# Altium PCB JO.PcbDoc
Units mm, origin at the board's own origin, x right, y up, seen from the top; angles counter-clockwise.
Board outline 80 x 25 mm, 2 copper layers (Top Layer, Bottom Layer), stack 1.57 mm thick; 8 components, 8 nets, 54 pads, 0 vias.
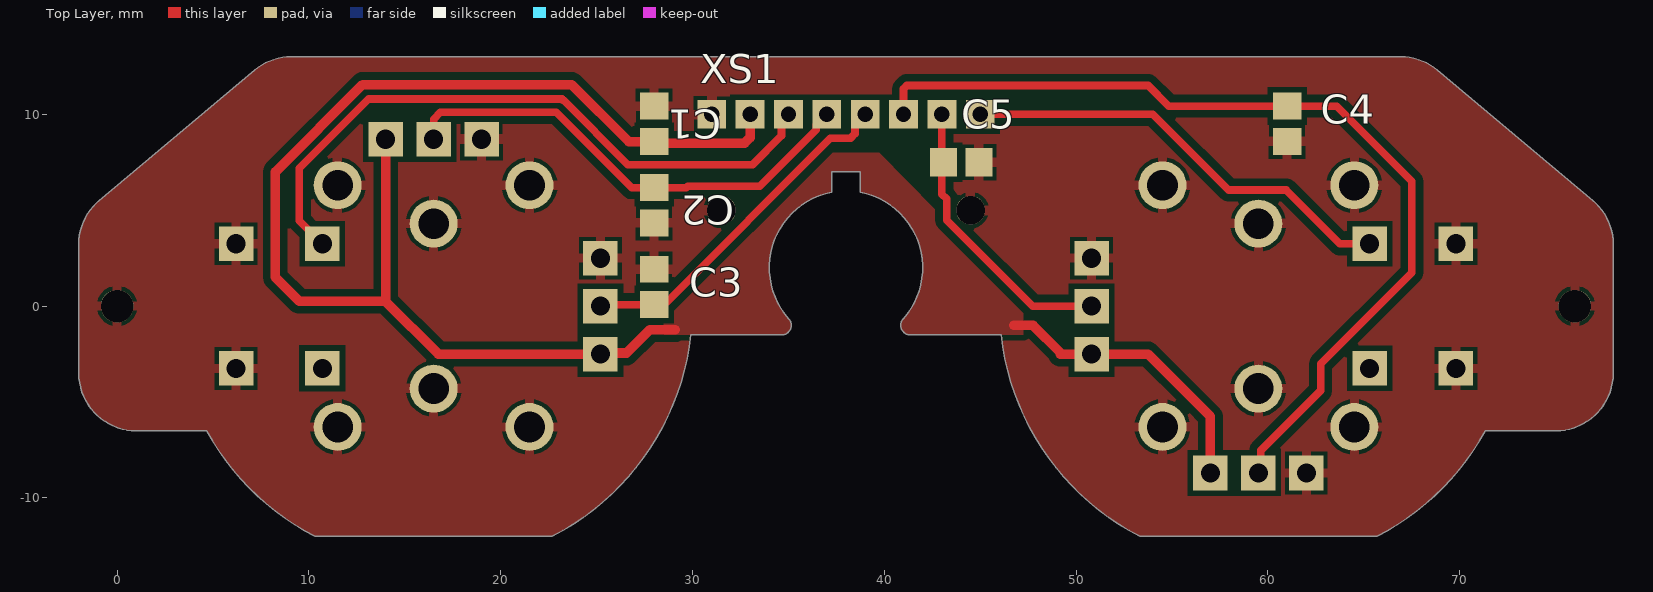
[diagram p0: Top Layer view]
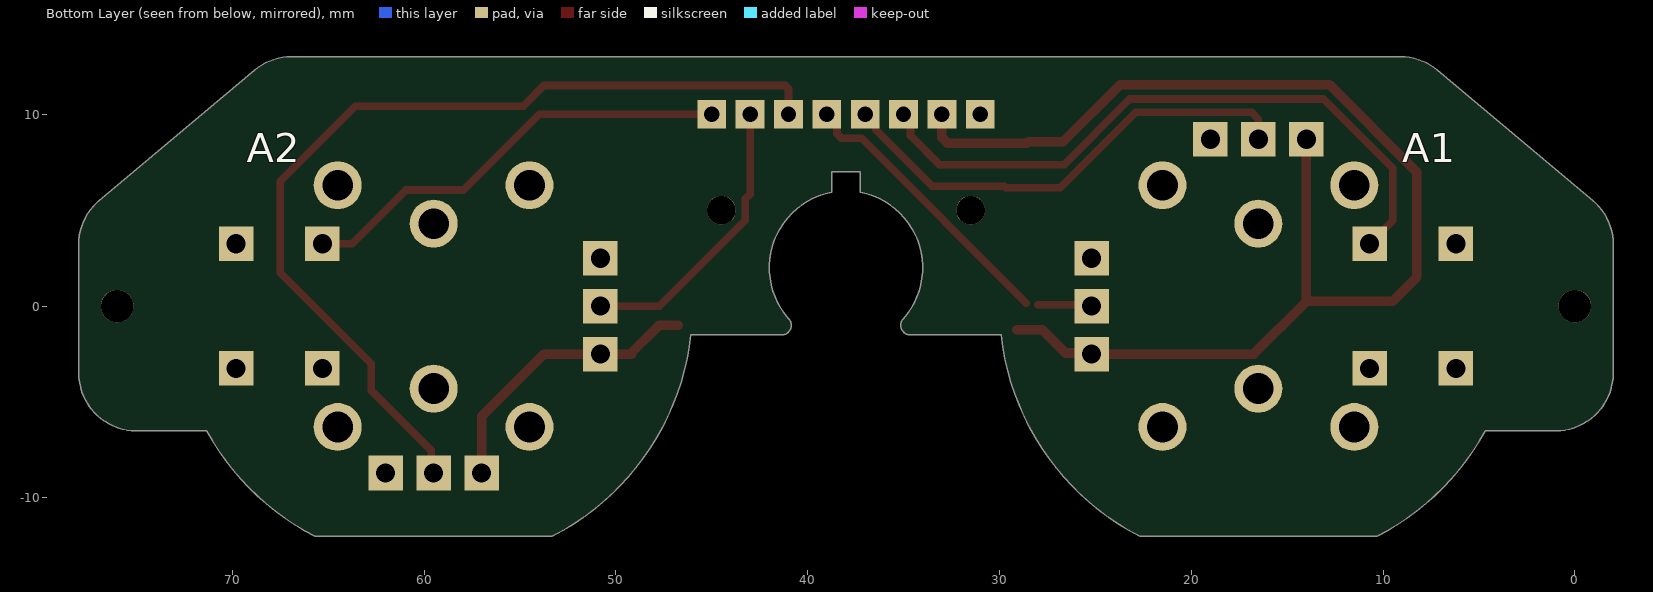
[diagram p1: Bottom Layer view, seen from below]

## Layer stack, top to bottom
Top Solder: solder mask 0.0102, Solder Resist, Dk 3.5
Top Layer: signal copper 0.0356
Dielectric 1: core 1.4986, Core-043, Dk 4.3
Bottom Layer: signal copper 0.0356
Bottom Solder: solder mask 0.0102, Solder Resist, Dk 3.5

## Board outline
1,-6.5 4.668,-6.5 ccw(c16.5,0) 10.315,-12 22.685,-12 ccw(c16.5,0) 29.916,-1.5 34.646,-1.5 ccw(c34.646,-1) 35.019,-0.667 cw(c38,2) 37.25,5.929 37.25,7 38.75,7 38.75,5.929 cw(c38,2) 40.981,-0.667 ccw(c41.354,-1) 41.354,-1.5 46.084,-1.5 ccw(c59.5,0) 53.315,-12 65.685,-12 ccw(c59.5,0) 71.332,-6.5 75,-6.5 ccw(c75,-3.5) 78,-3.5 78,3.21 ccw(c75,3.21) 76.928,5.508 68.836,12.298 ccw(c66.908,10) 66.908,13 9.092,13 ccw(c9.092,10) 7.164,12.298 -0.928,5.508 ccw(c1,3.21) -2,3.21 -2,-3.5 ccw(c1,-3.5)

## Design rules (kind name [scope] priority, off if disabled: settings)
Clearance [All] p1: gap=0.3 ignorepadtopadclearanceinfootprint=FALSE except(0: Arc-Hole Track-Hole SMDPad-Hole THPad-Hole Via-Hole Fill-Hole Poly-Hole Region-Hole Text-Hole; 0.4: Arc-Fill Arc-Poly Arc-Region Track-Fill Track-Poly Track-Region)
FanoutControl Fanout_Default [All] p1: bgadir=Out bgaviamode=Centered fanoutstyle=Auto fanoutdirection=Alternating viagrid=0.025 // Fanout_Default (Default Rule)
FanoutControl Fanout_Small [(CompPinCount < 5)] p2: bgadir=Out bgaviamode=Centered fanoutstyle=Auto fanoutdirection=OutThenIn viagrid=0.025 // Fanout_Small (Default Rule)
FanoutControl Fanout_LCC [IsLCC] p4: bgadir=Out bgaviamode=Centered fanoutstyle=Auto fanoutdirection=Alternating viagrid=0.025 // Fanout_LCC (Default Rule)
FanoutControl Fanout_BGA [IsBGA] p5: bgadir=Out bgaviamode=Centered fanoutstyle=Auto fanoutdirection=Alternating viagrid=0.025 // Fanout_BGA (Default Rule)
PlaneClearance [All] p1: clearance=0.6
PlaneConnect [All] p1: planeconnectstyle=Relief reliefexpansion=0.5 reliefentries=4 reliefconductorwidth=0.3 reliefairgap=0.2
PolygonConnect [All] p1: connectstyle=Relief reliefconductorwidth=0.5 reliefentries=4 polygonreliefangle="90 Angle" airgapwidth=0.2
RoutingCorners [All] p1: cornerstyle=45-Degree minsetback=2.5 maxsetback=2.5
RoutingVias [All] p1: holewidth=0.711 width=1.27 viastyle="Through Hole" minholewidth=0.711 minwidth=1.27 maxholewidth=0.711 maxwidth=1.27
SolderMaskExpansion [All] p1: expansion=0.102 istentingtop=FALSE
Width [All] p1: maxlimit=0.5 minlimit=0.3 preferedwidth=0.3
23 further rules are at their usual default settings.

## Components (designator, comment, footprint, x,y, rotation, side; value= is the part's Value field where it differs from the comment)
A1 "Kalih" Kalih 16.5,0 r0 bottom
A2 "Kalih" Kalih 59.5,0 r180 bottom
C1 "Cap_SMD0805" cap_0805 28,9.5 r270 top
C2 "Cap_SMD0805" cap_0805 28,5.25 r90 top
C3 "Cap_SMD0805" cap_0805 28,1 r270 top
C4 "Cap_SMD0805" cap_0805 61,9.5 r90 top
C5 "Cap_SMD0805" cap_0805 44,7.5 r180 top
XS1 "XS8" 8H_2.5mm 31,10 r0 top

## Footprints (in the part's own frame and the unit in brackets; to place one, negate y for a bottom-side part, rotate by r counter-clockwise, add the part's x,y. Pads: shape width x height; smd on the part's side, far side on the other; paste and mask are expansions set on the pad)
8H_2.5mm [mm]
  rect 1.5x1.5 hole 0.8: 1(0,0) 2(2,0) 3(4,0) 4(6,0) 5(8,0) 6(10,0) 7(12,0) 8(14,0)
cap_0805 [mm]
  rect 1.4x1.5 smd: 1(-0.925,0) 2(0.925,0)
  body extent -1.05,-0.67 1.05,0.67, height 1.35
Kalih [mm]
  rect 1.8x1.8 hole 1 unplated: 1(-2.5,-8.7) 2(0,-8.7) 3(2.5,-8.7) 4(8.7,-2.5) 5(8.7,0) 6(8.7,2.5) 7(-5.8,3.25) 8(-5.8,-3.25) 9(-10.3,3.25) 10(-10.3,-3.25)
  round 2.5 hole 1.6: 11(-5,-6.3) 11(-5,6.3) 11(5,-6.3) 11(5,6.3)
  round 2.5 hole 1.6 unplated: 11(0,-4.3) 11(0,4.3)

## Part data
C1: Ёмкость=0,1
C2 C3 C4 C5: Ёмкость=0.01

## Free pads (board coordinates)
  round 1.7 hole 1.7 unplated: 0(0,0) 0(76,0)
  round 1.5 hole 1.5 unplated: 0(31.5,5) 0(44.5,5)

## Nets (pads, with @x,y where several pads share a name; then routed paths per layer and width w, separated by ;. In a path a pad name is that pad's centre, name@x,y a point inside that pad or via, vN(x,y) a via of type N, cw(c..) or ccw(c..) an arc to the next point about the centre after c; other vN are vias at no path point)
GND: A1.3 A1.4 A1.9 A1.10 A1.11 A2.1 A2.6 A2.9 A2.10 A2.11 C1.1 C2.1 C3.1 C4.1 C5.1 pad.0 XS1.1
NetA1_2: A1.2 C2.2 XS1.4 | length 25.1
  Top Layer w0.4: A1.2 16.5,9.75 16.85,10.1 22.9,10.1 26.825,6.175 C2.2 29.675,6.175 29.75,6.25 33.5,6.25 36.45,9.2 36.45,9.45 XS1.4
NetA1_5: A1.5 C3.2 XS1.5 | length 17.6
  Top Layer w0.4: A1.5 25.275,0.075 C3.2 ; C3.2@28.595,0.155 37.189,8.75 38.233,8.75 38.467,8.984 38.467,9.467 XS1.5
NetA1_8: A1.8 XS1.3 | length 34.4
  Top Layer w0.4: A1.8 9.5,4.45 9.5,7.189 13.111,10.8 23.19,10.8 23.24,10.75 23.25,10.75 26.625,7.375 33.125,7.375 34.634,8.884 34.634,9.634 XS1.3
NetA2_2: A2.2 C4.2 XS1.6 | length 48.5
  Top Layer w0.4: XS1.6 41,11.324 41.176,11.5 53.75,11.5 54.825,10.425 C4.2 63.575,10.425 67.5,6.5 67.5,1.75 62.75,-3 62.75,-4.399 59.623,-7.526 59.623,-8.577 A2.2
NetA2_5: A2.5 C5.2 XS1.7 | length 15
  Top Layer w0.4: XS1.7 43,5.841 43.25,5.591 43.25,4.482 47.732,0 A2.5
NetA2_7: A2.7 XS1.8 | length 23.1
  Top Layer w0.4: XS1.8 54,10 57.95,6.05 60.95,6.05 63.75,3.25 A2.7
VCC: A1.1 A1.6 A2.3 A2.4 C1.2 XS1.2 | length 81.4
  Top Layer w0.5: A1.1 14,0.25 ; 29.106,-1.222 27.778,-1.222 26.557,-2.443 25.257,-2.443 A1.6 16.75,-2.5 14,0.25 ; XS1.2 33,8.793 32.707,8.5 28.575,8.5 28.5,8.575 C1.2 26.675,8.575 23.7,11.55 12.8,11.55 8.25,7 8.25,1.5 9.5,0.25 14,0.25 ; 46.75,-1 47.75,-1 49.172,-2.422 49.172,-2.5 A2.4 53.75,-2.5 57,-5.75 A2.3
pads on no net: A1.7 A2.8

## Polygon pours and split planes (outlines as drawn)
VCC on Top Layer "VCC_L01_P001" (solid, pour order 1): 28.5,0.367 28.5,-1.5 34.646,-1.5 ccw(c34.646,-1) 35.019,-0.667 cw(c38,2) 37.25,5.929 37.25,7 38.75,7 38.75,5.929 cw(c38,2) 40.981,-0.667 ccw(c41.354,-1) 41.354,-1.5 47.25,-1.5 47.25,0.367 39.738,8 36.239,8
GND on Top Layer "GND_L01_P003" (solid, remove dead copper, pour order 3): 1,-6.5 4.668,-6.5 ccw(c16.5,0) 10.315,-12 22.685,-12 ccw(c16.5,0) 29.916,-1.5 26.75,-1.5 37,8.75 39,8.75 49.25,-1.5 46.084,-1.5 ccw(c59.5,0) 53.315,-12 65.685,-12 ccw(c59.5,0) 71.332,-6.5 75,-6.5 ccw(c75,-3.5) 78,-3.5 78,3.21 ccw(c75,3.21) 76.928,5.508 68.836,12.298 ccw(c66.908,10) 66.908,13 9.092,13 ccw(c9.092,10) 7.164,12.298 -0.928,5.508 ccw(c1,3.21) -2,3.21 -2,-3.5 ccw(c1,-3.5)

## Silkscreen, mask and mechanical layers (free items; w line width, h text height)
Board:
  the board outline again, w0.3
Mechanical 5:
  circle w0.3: c76,0 r0.85
  circle w0.3: c0,0 r0.85
  circle w0.3: c44.5,5 r0.75
  circle w0.3: c31.5,5 r0.75
  lines w0.3: -2,-3.5 ccw(c1,-3.5) 1,-6.5 4.668,-6.5 ccw(c16.5,0) 10.315,-12 22.685,-12 ccw(c16.5,0) 29.916,-1.5 34.646,-1.5 ccw(c34.646,-1) 35.019,-0.667 cw(c38,2) 37.25,5.929 37.25,7 38.75,7 38.75,5.929 cw(c38,2) 40.981,-0.667 ccw(c41.354,-1) 41.354,-1.5 46.084,-1.5 ccw(c59.5,0) 53.315,-12 65.685,-12 ccw(c59.5,0) 71.332,-6.5 75,-6.5 ccw(c75,-3.5) 78,-3.5 78,3.21 ccw(c75,3.21) 76.928,5.508 68.836,12.298 ccw(c66.908,10) 66.908,13 9.092,13 ccw(c9.092,10) 7.164,12.298 -0.928,5.508 ccw(c1,3.21) -2,3.21 -2,-3.5